# Altium PCB Expand_Board_no_arduino.PcbDoc
Units mil, origin at the board's own origin, x right, y up, seen from the top; angles counter-clockwise.
Board outline 6000 x 4000 mil, 2 copper layers (Top Layer, Bottom Layer); 45 components, 34 nets, 174 pads, 34 vias.
Unrouted connection lines stored in the file: 1.
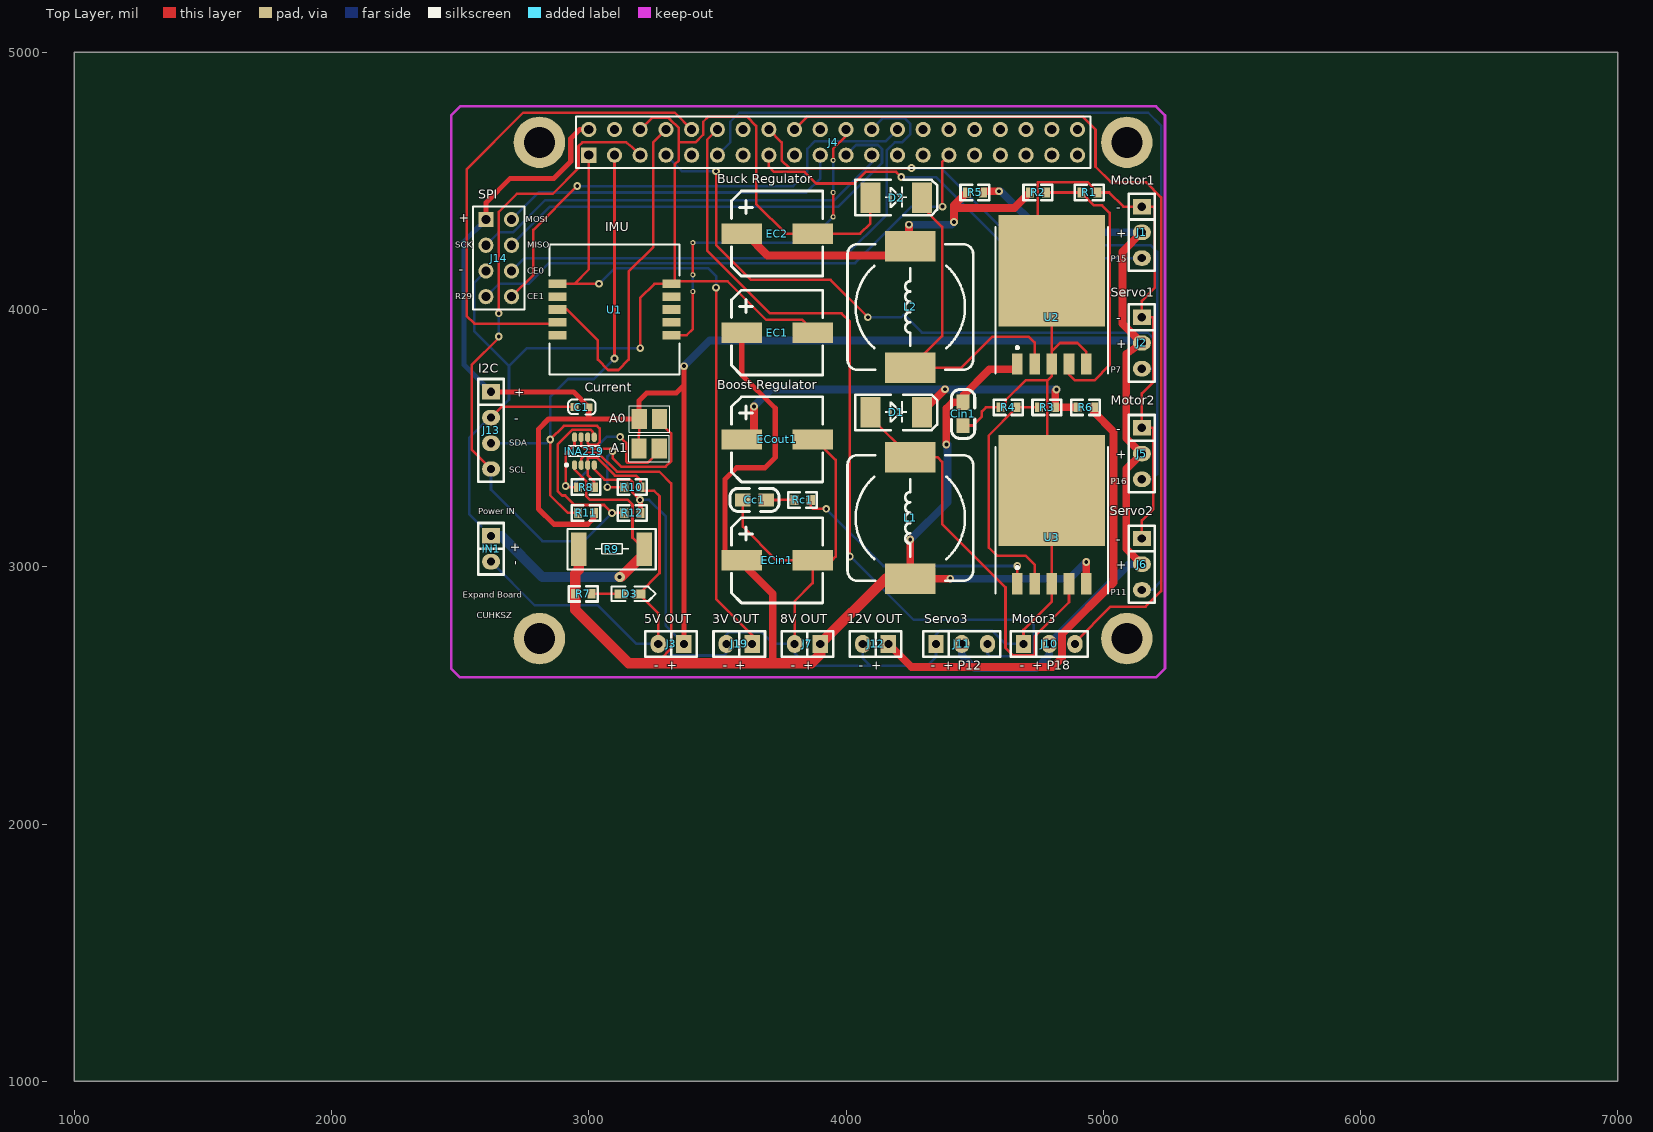
[diagram p0: Top Layer view]
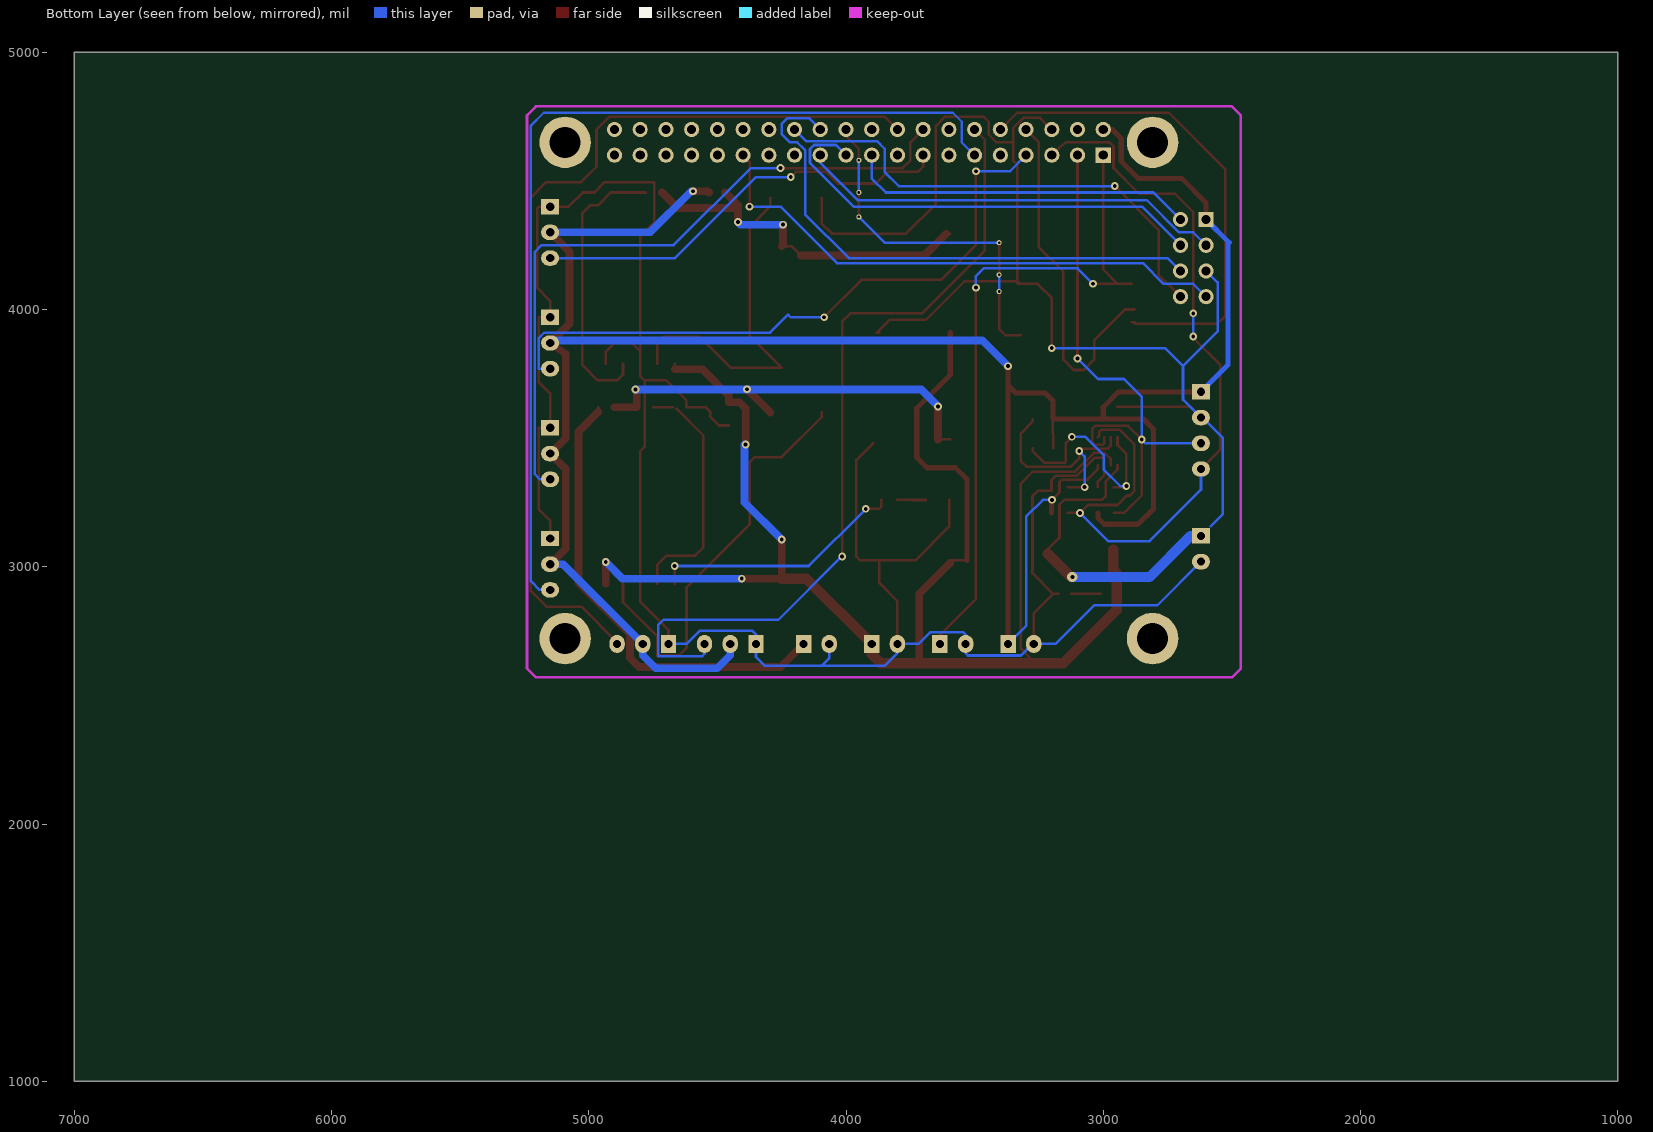
[diagram p1: Bottom Layer view, seen from below]

## Layer stack, top to bottom
Top Solder: solder mask 0.4, Solder Resist, Dk 3.5
Top Layer: signal copper 1.4
Dielectric 1: dielectric 12.6, FR-4, Dk 4.8
Bottom Layer: signal copper 1.4
Bottom Solder: solder mask 0.4, Solder Resist, Dk 3.5

## Board outline
1000,1000 7000,1000 7000,5000 1000,5000

## Design rules (kind name [scope] priority, off if disabled: settings)
Clearance [All] p1: gap=0
PolygonConnect [All] p1: connectstyle=Relief reliefconductorwidth=10 reliefentries=4 polygonreliefangle="90 Angle" airgapwidth=10
RoutingVias [All] p1: holewidth=28 width=50 viastyle="Through Hole" minholewidth=28 minwidth=50 maxholewidth=28 maxwidth=50
SolderMaskExpansion [All] p1: expansion=4
Width [All] p1: maxlimit=50 minlimit=10 preferedwidth=10
30 further rules are at their usual default settings.

## Components (designator, comment, footprint, x,y, rotation, side; value= is the part's Value field where it differs from the comment)
A0 "Switch_A0" TSOP65P180X145-2N 3235.31,3574 r0 top
A1 "Switch_A1" TSOP65P180X145-2N 3234.37,3460 r0 top
C1 "CAP1uF" 0603C 3000,3620 r180 top
Cc1 "CAP0.47uF" 0805C 3600,3260 r0 top
Cin1 "CAP 0.1uF" 0805C 4455,3550 r90 top
D1 "DIODE SCHOTTKY 1N5820" SMA/DO-214AC 4100,3600 r0 top
D2 "DIODE 5A  40V" SMA/DO-214AC 4100,4435 r0 top
D3 "LED" LED-0603B 3125,2894.74 r0 top
EC1 "Cin 470uF 50V" SMD-EC8X8X10 3865,3915 r0 top
EC2 "Cout  220uF 35V" SMD-EC8X8X10 3865,4300 r0 top
ECin1 "SMD_ECAP  100uF   25V" SMD-EC8X8X10 3865,3030 r0 top
ECout1 "SMD_ECAP  680uF    16V" SMD-EC8X8X10 3865,3500 r0 top
IN1 "Power In" "Pin HDR1X2/2.54mm-S" 2620,3120 r0 top
INA219 "INA219" INA219 2983.04,3449.39 r90 top
J1 "Motor1" "Pin HDR1X3/2.54mm-S" 5150,4400 r0 top
J2 "Servo1" "Pin HDR1X3/2.54mm-S" 5150,3970 r0 top
J3 "Power 5V" "Pin HDR1X2/2.54mm-S" 3370,2700 r270 top
J4 "Raspberry Pi" "Pin HDR2X20/2.54mm-S" 3000,4600 r0 top
J5 "Motor2" "Pin HDR1X3/2.54mm-S" 5150,3540 r0 top
J6 "Servo2" "Pin HDR1X3/2.54mm-S" 5150,3110 r0 top
J7 "Power 8V" "Pin HDR1X2/2.54mm-S" 3900,2700 r270 top
J10 "Motor3" "Pin HDR1X3/2.54mm-S" 4690,2700 r90 top
J11 "Servo3" "Pin HDR1X3/2.54mm-S" 4350,2700 r90 top
J12 "Power 12V" "Pin HDR1X2/2.54mm-S" 4165,2700 r270 top
J13 "I2C" "Pin HDR1X4/2.54mm-S" 2620,3680 r0 top
J14 "SPI" "Pin HDR2X4/2.54mm-S" 2600,4350 r270 top
J19 "Small Power 3V" "Pin HDR1X2/2.54mm-S" 3635,2700 r270 top
L1 "INDUCTOR CD127-68UH 680" CDRH127 4250,3190 r90 top
L2 "INDUCTOR   68uH" CDRH127 4250,4010 r90 top
R1 "RES1k" 0603R 4915,4455 r0 top
R2 "RES 3.3k" 0603R 4715,4455 r0 top
R3 "RES 48.7k" 0603R 4750,3620 r0 top
R4 "RES  5.62k" 0603R 4600,3620 r0 top
R5 "RES 0Ω" 0603R 4470,4455 r0 top
R6 "RES 0Ω" 0603R 4900,3620 r0 top
R7 "RES 1.5k" 0603R 3010,2895 r180 top
R8 "RES10k" 0603R 2958.04,3309.39 r0 top
R9 "RES0.1" 2512R 3213.04,3069.39 r180 top
R10 "RES10k" 0603R 3138.04,3309.39 r0 top
R11 "RES10k" 0603R 2958.04,3209.39 r0 top
R12 "RES10k" 0603R 3138.04,3209.39 r0 top
Rc1 "RES 2k" 0603R 3800,3260 r0 top
U1 "HI219M_IMU" SON127P1220X265-10N 3100,4000 r0 top
U2 "LM2596S-ADJ" TO-263-5 4800,3955 r0 top
U3 "LM2587S-ADJ" TO-263-5 4800,3100 r0 top

## Footprints (in the part's own frame and the unit in brackets; to place one, negate y for a bottom-side part, rotate by r counter-clockwise, add the part's x,y. Pads: shape width x height; smd on the part's side, far side on the other; paste and mask are expansions set on the pad)
0603C [mil]
  rect 30x30 smd: 1(0.21,-0.35) 2(55.21,-1.35)
  silkscreen extent -26,-30 81,28, body extent -1,-15 62,17, height 12
0603R [mm]
  rect 0.8x0.965 smd: 1(0,0) 2(1.6,0)
  silkscreen extent -0.64,-0.76 2.21,0.76, body extent -0.04,-0.41 1.56,0.41, height 0.45
0805C [mil]
  rect 60x50 smd: 1(-0.71,-0.4) 2(89.29,-0.4)
  silkscreen extent -51,-45 139,45, body extent 6,-25 84,25, height 31
2512R [mil]
  rect 61x129.92 smd: 1(-3.11,2) 2(251.89,2)
  silkscreen extent -47,-77 296,81, body extent 0,-63 249,63, height 24
CDRH127 [mm] "12*12*8mm（长宽高）"
  rect 3x5 smd: 1(-6,0) 2(6,0)
  silkscreen extent -6.2,-6.2 6.2,6.2, body extent -5.87,-6.03 6.13,5.97, height 7.8
INA219 [mm] "TSOP, 8-Leads, Body 2.90x1.60mm, Pitch 0.65mm, IPC Medium Density"
  oval 0.95x0.5 smd: 1(-1.375,0.975) 2(-1.375,0.325) 3(-1.375,-0.325) 4(-1.375,-0.975) 5(1.375,-0.975) 6(1.375,-0.325) 7(1.375,0.325) 8(1.375,0.975)
  silkscreen extent -1.5,-1.5 0.5,1.9, body extent -0.9,-1.5 0.9,1.5, height 1.45
LED-0603B [mil]
  rect 50x35 smd: A(0,0.26) K(70,0.26)
  silkscreen extent -36,-28 135,28, body extent 4,-15 66,17, height 24
"Pin HDR1X2/2.54mm-S" [mil]
  rect 70x60 hole 32: 1(0,0)
  oval 70x60 hole 32: 2(0,-100)
  silkscreen extent -50,-150 50,50, body extent -50,-150 50,50, height 336
"Pin HDR1X3/2.54mm-S" [mil]
  rect 70x60 hole 32: 1(0,0)
  oval 70x60 hole 32: 2(0,-100) 3(0,-200)
  silkscreen extent -50,-250 50,50, body extent -50,-250 50,50, height 336
"Pin HDR1X4/2.54mm-S" [mil]
  rect 70x60 hole 32: 1(0,0)
  oval 70x60 hole 32: 2(0,-100) 3(0,-200) 4(0,-300)
  silkscreen extent -50,-350 50,50, body extent -50,-350 50,50, height 336
"Pin HDR2X4/2.54mm-S" [mm] "Connector; Header; 4x2 Position"
  rect 1.5x1.5 hole 0.9: 1(0,0)
  round 1.5 hole 0.9: 2(0,2.54) 3(2.54,0) 4(2.54,2.54) 5(5.08,0) 6(5.08,2.54) 7(7.62,0) 8(7.62,2.54)
  silkscreen extent -1.27,-1.27 8.89,3.81, body extent -1.27,-1.27 8.89,3.81, height 7.58
"Pin HDR2X20/2.54mm-S" [mm] "Connector; Header; 20x2 Position"
  rect 1.5x1.5 hole 0.9: 1(0,0)
  round 1.5 hole 0.9: 2(0,2.54) 3(2.54,0) 4(2.54,2.54) 5(5.08,0) 6(5.08,2.54) 7(7.62,0) 8(7.62,2.54) 9(10.16,0) 10(10.16,2.54) 11(12.7,0) 12(12.7,2.54) 13(15.24,0) 14(15.24,2.54) 15(17.78,0) 16(17.78,2.54) 17(20.32,0) 18(20.32,2.54) 19(22.86,0) 20(22.86,2.54) 21(25.4,0) 22(25.4,2.54) 23(27.94,0) 24(27.94,2.54) 25(30.48,0) 26(30.48,2.54) 27(33.02,0) 28(33.02,2.54) 29(35.56,0) 30(35.56,2.54) 31(38.1,0) 32(38.1,2.54) 33(40.64,0) 34(40.64,2.54) 35(43.18,0) 36(43.18,2.54) 37(45.72,0) 38(45.72,2.54) 39(48.26,0) 40(48.26,2.54)
  silkscreen extent -1.27,-1.27 49.53,3.81, body extent -1.27,-1.27 49.53,3.81, height 7.58
SMA/DO-214AC [mm] "塑封二极管"
  rect 2x3 smd: A(-0.127,0) K(4.953,0)
  silkscreen extent -1.63,-1.75 6.48,1.75, body extent 0.11,-1.35 4.71,1.35, height 2.4
SMD-EC8X8X10 [mm]
  rect 4x2 smd: 1(-6.858,-0.127) 2(0.142,-0.127)
  silkscreen extent -7.88,-4.32 1.12,4.08, body extent -8.38,-4.28 1.52,4.02, height 10.2
SON127P1220X265-10N [mm] "SON, 10-Leads, Body 12.25x12.25mm, Pitch 1.27mm, IPC Medium Density"
  rect 1.8x0.85 smd: 1(-5.63,2.54) 2(-5.63,1.27) 3(-5.63,0) 4(-5.63,-1.27) 5(-5.63,-2.54) 6(5.63,-2.54) 7(5.63,-1.27) 8(5.63,0) 9(5.63,1.27) 10(5.63,2.54)
  silkscreen extent -6.4,-6.4 6.4,6.4, body extent -6.25,-6.25 6.25,6.25, height 2.65
TO-263-5 [mm] "贴片LM2596"
  rect 1.05x2.1 smd: 1(-3.4,-4.225) 2(-1.7,-4.225) 3(0,-4.225) 4(1.7,-4.225) 5(3.4,-4.225)
  rect 10.5x11 smd: 6(0,4.987)
  silkscreen extent -5.55,-5.18 5.55,9.28, body extent -5.33,-4.7 5.33,10.29, height 3
TSOP65P180X145-2N [mm] "TSOP, 2-Leads, Body 1.00x0.15mm, Pitch 0.65mm, IPC Medium Density"
  rect 1.5x2 smd: 1(-1,0) 2(1,0)
  silkscreen extent -2,-1.3 2,1.3

## Part data
A0 A1 U1: library part Component_1
C1 Cc1 Cin1: library part CAP, "无极性电容"
D1 D2: library part "DIODE SCHOTTKY", "肖特基二极管"
EC1 EC2 ECin1 ECout1: library part SMD_ECAP, "贴片电解电容"
IN1 J3 J7 J12 J19: library part "Pin HDR1X2"
J1 J2 J5 J6 J10 J11: library part "Pin HDR1X3"
J4: library part "Pin HDR2X20"
J13: library part "Pin HDR1X4"
J14: library part "Pin HDR2X4"
L1 L2: library part INDUCTOR, "INDUCTOR"
R1 R2 R3 R4 R5 R6 R7 R8 R9 R10 R11 R12 Rc1: library part RES
U2: "可调稳压芯片"
U3: library part LM2577S-ADJ, "DC升压"

## Free pads (board coordinates)
  round 200 hole 120: 0(2808.27,2720.87) 0(2808.27,4650) 0(5091.73,2720.87) 0(5091.73,4650)
  round 20 hole 10: 2(3405,4070) 3(3405,4135) 4(3405,4260) 5(3950,4360) 6(3950,4455) 9(3950,4580)

## Via types
v1: diameter 30, hole 15, Top Layer to Bottom Layer, 33 vias
v2: diameter 40, hole 15, Top Layer to Bottom Layer, 1 vias

## Nets (pads, with @x,y where several pads share a name; then routed paths per layer and width w, separated by ;. In a path a pad name is that pad's centre, name@x,y a point inside that pad or via, vN(x,y) a via of type N, cw(c..) or ccw(c..) an arc to the next point about the centre after c; other vN are vias at no path point)
A0: A0.2 INA219.7 R10.1 | length 838.8
  Top Layer w10: INA219.7 2970.24,3471.01 2983.25,3458 3085,3458 v1(3093,3450) 3093,3422 3125.87,3389.13 3299.13,3389.13 3320,3410 3320,3518.69 3274.69,3564 A0.2 ; v1(3072.39,3309.39) R10.1
  Bottom Layer w10: v1(3072.39,3309.39) 3072.39,3429.39 v1(3093,3450)
A1: A1.2 INA219.8 R8.1 | length 842.6
  Top Layer w10: INA219.8 2944.65,3472.5 2910,3437.85 v1(2910,3313.79) 2914.39,3309.39 R8.1 ; v1(3122,3505) 3145,3482 3145,3410 3150,3405 3230,3405 3273.74,3448.74 A1.2
  Bottom Layer w10: v1(2910,3313.79) 2933.79,3313.79 2998.71,3378.71 2998.71,3434.63 3069.09,3505 v1(3122,3505)
CE0: J4.24 J14.6 | length 2133
  Bottom Layer w10: J14.6 2750,4200 3989,4200 4159,4370 4159,4619.47 4189.53,4650 4217.53,4650 4250,4682.47 4250,4721 4227,4744 4144,4744 J4.24
CE1: J4.26 J14.8 | length 1924.5
  Top Layer w10: J14.8 2785,4135 2785,4310 v1(2955,4480)
  Bottom Layer w10: v1(2955,4480) 3795,4480 3850,4535 3850,4625 3880,4655 4155,4655 J4.26
GND: C1.2 Cc1.1 Cin1.1 D2.A D3.K EC1.2 EC2.2 ECin1.2 ECout1.2 IN1.2 INA219.3 J1.1 J2.1 J3.2 J4.6 J5.1 J6.1 J7.2 J10.1 J11.1 J12.2 J13.2 J14.5 J19.2 R1.2 R4.1 R8.2 R10.2 U1.10 U2.3 U2.5 U2.6 U3.3 U3.6 | length 14687
  Top Layer w10: J13.2 2661.35,3621.35 C1.2 ; R8.2 3021.03,3330.8 2995.84,3356 2995.84,3422.38 2997.42,3423.96 3032,3423.96 3101.96,3354 3184.03,3354 3201.03,3337 3201.03,3295.4 3254.6,3295.4 3275,3275 3275,2975 D3.K ; D3.K@3175,2895 D3.K ; v1(3200,3850) 3200,4045 3255,4100 U1.10 3331.65,4100 U1.10@3336.65,4105 ; J4.6 3245,4745 3310,4745 3315.47,4739.53 3316.37,4739.53 3350,4705.9 3350,4650 ; J3.2 3270,2820 D3.K ; U1.10@3329.05,4106.88 3335,4112.82 3335,4565 3350,4580 3350,4650 ; U1.10@3332.31,4105 U1.10@3336.65,4105 ; Cc1.1 3599.29,3155.71 3730,3025 ECin1.2 ; J7.2 3800,2866 3870.59,2936.59 ECin1.2 ; EC1.2 3880,3910 3830,3960 3690,3960 3540,4110 3341.65,4110 U1.10@3336.65,4105 ; ECout1.2@3895,3480 3960,3415 3960,3040 3945,3025 ECin1.2 ; D2.A 4095,4335 4055,4295 EC2.2 3767,4295 3651,4411 3651,4714 3615,4750 3465,4750 3445,4730 3445,4680 3415,4650 3350,4650 ; Cin1.1 4493.29,3549.29 4528,3584 4528,3604 4544,3620 R4.1 4621,3620 4621,3648 4698,3725 4783,3725 4800,3740.7 ; J10.1 4690,2755 4800,2865 U3.3 U3.6 4800,3449 4783,3466 4783,3723.7 4800,3740.7 ; U2.5 4933.86,3836.14 4900,3870 4832,3870 4800,3838 ; J6.1 5150,3180 5195,3225 5195,3540 J5.1 5150,3674 5195,3719 5195,3970 J2.1 5150,4034 5201,4085 5201,4392 5193,4400 J1.1 5078,4400 5023,4455 R1.2 4937.99,4495 4745,4495 4745,4341 4800,4286 U2.6 4800,3838 ; 4800,3740.7 U2.3 4800,3838
  Bottom Layer w10: 2582.81,3157.19 2535,3205 2535,3500 2615,3580 J13.2 2690,3650 2690,3780 ; J14.5 2555,4105 2555,3915 2690,3780 ; IN1.2 2790,2850 3035,2850 3185,2700 J3.2 3275,2700 3320,2655 3526,2655 3535,2664 J19.2 3535,2736 3544,2745 3673,2745 3718,2700 J7.2 3800,2665 3850,2615 4095,2615 ; v1(3200,3850) 2760,3850 2690,3780 ; J12.2 4065,2645 4095,2615 ; J10.1 4620,2700 4568,2752 4366,2752 4350,2736 J11.1 4350,2650 4315,2615 4095,2615
MISO: J4.21 J14.4 | length 1789.4
  Bottom Layer w10: J14.4 2850,4400 3970,4400 4140,4570 4140,4624 4124.47,4639.53 4039.53,4639.53 J4.21
MOSI: J4.19 J14.2 | length 1366.3
  Bottom Layer w10: J14.2@2700,4340 J14.2 2805,4455 3845,4455 3900,4510 J4.19
MOTOR1: J1.3 J4.15 | length 1679.3
  Top Layer w10: J4.15 3700,4555 3720,4535 3838.75,4535 3883.75,4490 4031.25,4490 4076.25,4535 4195,4535 v1(4215,4515)
  Bottom Layer w10: v1(4215,4515) 4350,4515 4665,4200 J1.3
MOTOR2: J4.16 J5.3 | length 2680.5
  Top Layer w10: J4.16 3750,4650 3750,4580 3780,4550 4136.25,4550 v1(4255,4550)
  Bottom Layer w10: v1(4255,4550) 4370,4550 4670,4250 5184,4250 5210,4224 5210,3360 5190,3340 J5.3
MOTOR3: J4.18 J10.3 | length 3615.1
  Top Layer w10: J4.18 3850,4750 4920,4750 4970,4700 4970,4555 5030,4495 5166,4495 5225,4436 5225,2905 5165,2845 5029,2845 4890,2706 J10.3
NetCc1_2: Cc1.2 Rc1.1 | length 110.9
  Top Layer w10: Cc1.2 3744,3259.6 3744.4,3260 Rc1.1
NetD1_A: D1.A L1.2 U3.4 | length 1654
  Top Layer w10: D1.A 4095,3581.22 L1.2 4355.78,3426.22 4374,3408 4374,3166 4620,2920 4620,2685 4650,2655 4733,2655 4733,2728.07 4866.93,2862 U3.4
NetD2_K: D2.K L2.1 U2.2 | length 1371
  Top Layer w10: D2.K 4295,4400 4373.43,4321.57 4373.43,3897.21 L2.1 4448.78,3773.78 4570,3895 4710.07,3895 4733.07,3872 U2.2
NetD3_A: D3.A R7.1 | length 115
  Top Layer w10: R7.1 D3.A
NetR1_1: R1.1 R2.2 U2.4 | length 1104.4
  Top Layer w10: R2.2 R1.1 4965,4405 4996,4405 5025,4376 5025,3784 4966,3725 4890,3725 4866.93,3748.07 U2.4
NetR3_1: R3.1 R4.2 U3.2 | length 939.7
  Top Layer w10: R4.2@4659.81,3614.81 4555,3510 4555,3075 4586.38,3043.62 4697.45,3043.62 4733.07,3008 U3.2 ; R4.2@4673.66,3620 R3.1
NetRc1_2: Rc1.2 U3.1 | length 994.2
  Top Layer w10: Rc1.2 3862.99,3234.01 3872,3225 v1(3923,3225) ; U3.1 v1(4666.14,3003)
  Bottom Layer w10: v1(3923,3225) 4145,3003 v1(4666.14,3003)
RST_IMU: J4.22 pad.2 pad.3 pad.4 pad.5 pad.6 pad.9 U1.6 | length 1375.8
  Top Layer w10: U1.6 3380,3900 3405,3925 pad.2 ; pad.3 pad.4 ; pad.5 pad.6 ; pad.9 3950,4625 4000,4675 J4.22
  Bottom Layer w10: pad.2 pad.3 ; pad.4 3850,4260 pad.5 ; pad.6 pad.9
RST_SPI: J4.29 J14.7 | length 2130.3
  Top Layer w10: v1(4375,4400) 4375,4575 J4.29
  Bottom Layer w10: J14.7 2650,4100 2765,4100 2845,4180 4035,4180 4255,4400 v1(4375,4400)
RXD_PI: J4.10 U1.4 | length 1935.5
  Top Layer w10: U1.4@2875,3945 2555,3945 2525,3975 2525,4545 2745,4765 3335,4765 J4.10 ; U1.4 U1.4@2888.35,3950
SCL: INA219.5 J4.5 J13.4 R12.1 | length 3147.1
  Top Layer w10: J13.4 2545,3455 2545,3785 2650,3890 v1(2650,3895) ; v1(2650,3985) 2650,4380 2720,4450 2860,4450 2960,4550 2960,4635 2975,4650 3145.47,4650 3167.74,4632.26 J4.5 ; INA219.5 3015.68,3509.28 3015.68,3524.32 3007,3533 2936,3533 2879,3476 2879,3294 2896,3277 2908,3277 2945,3240 3059.39,3240 v1(3090,3209.39) R12.1
  Bottom Layer w10: J13.4 2620,3300 2820,3100 2980.61,3100 v1(3090,3209.39) ; v1(2650,3895) v1(2650,3985)
SCLK: J4.23 J14.3 | length 1662.5
  Bottom Layer w10: J14.3 2650,4300 2705.9,4300 2830.9,4425 3955,4425 4100,4570 J4.23
SDA: INA219.6 J4.3 J13.3 R11.1 | length 2219.6
  Top Layer w10: R11.1 2918.61,3209.39 2850,3278 v1(2850,3495) 2903,3548 3032,3548 3042,3538 3042,3484 3032,3474 3002.84,3474 2995.84,3481 INA219.6 ; v1(3100,3810) J4.3
  Bottom Layer w10: J13.3@2605,3465 J13.3@2620,3465 ; J13.3 2835,3480 v1(2850,3495) 2850,3660 2920,3730 3020,3730 v1(3100,3810)
SERVO1: J2.3 J4.7 | length 2529.6
  Top Layer w10: v1(3495,4537.5) 3495,4250 3630,4115 3940,4115 v1(4085,3970)
  Bottom Layer w10: J4.7 3362.5,4537.5 v1(3495,4537.5) ; v1(4085,3970) 4215,3970 4225,3980 4295,3910 5173,3910 5195,3888 5195,3770 J2.3
SERVO2: J4.11 J6.3 | length 3721
  Bottom Layer w10: J4.11 3550,4650 3550,4730 3585,4765 5175,4765 5225,4715 5225,2944 5191,2910 J6.3
SERVO3: J4.12 J11.3 | length 3240.9
  Top Layer w10: J4.12 3460,4660 3460,4230 3705,3985 3983,3985 4015,3953 v1(4015,3040)
  Bottom Layer w10: v1(4015,3040) 4015,3042 4263,2794 4709,2794 4730,2773 4730,2652 4560,2652 4550,2662 J11.3
TXD_PI: J4.8 U1.3 | length 1389.6
  Top Layer w10: U1.3 2915,4000 3035,3880 3035,3805 3075,3765 3115,3765 3155,3805 3155,4147 3250,4242 3250,4650 J4.8
VCC_3V: J4.1 J19.1 U1.1 | length 2655.1
  Top Layer w10: U1.1@2888.35,4100 2944,4100 ; J4.1 3000,4156 2944,4100 ; v1(3040,4100) 2944,4100 ; v1(3495,4085) 3495,2875 3635,2735 J19.1
  Bottom Layer w10: v1(3040,4100) 3100,4160 3465,4160 3495,4130 v1(3495,4085)
VCC_5V: A0.1 A1.1 C1.1 INA219.4 J1.2 J2.2 J3.1 J4.2 J5.2 J6.2 J10.2 J11.2 J13.1 J14.1 R5.2 R11.2 R12.2 | length 10189.5
  Top Layer w10: 2999.79,3574.21 3000,3574 ; INA219.4 3021.43,3378.57 3061,3339 3160,3339 3170,3329 3170,3289 v1(3199,3260) v1@3201.03,3257.97 ; A1.1 3195,3516 3195.94,3516.94 A0.1
  Top Layer w20: J14.1 2600,4415 2695,4510 2865,4510 2930,4575 2930,4665 2965,4700 J4.2 ; J13.1 2940.14,3680 C1.1 2999.79,3574.21 ; R11.2 3021.03,3189.82 2996.21,3165 2865,3165 2805,3225 2805,3535 2844,3574 3000,3574 A0.1 3195.94,3645.94 3225,3675 3340,3675 3370,3705 ; R12.2 v1@3201.03,3257.97 ; J3.1 3370,3705 ; v1(3370,3780) 3370,3705
  Top Layer w30: R5.2 4537.99,4460 v1(4595,4460) ; J6.2 5090,3070 5090,3380 J5.2 5090,3500 5090,3827 J2.2 5075,3945 5075,4225 J1.2
  Bottom Layer w10: 2510,4260 2515,4255 ; v1(3199,3260) 3235,3260 3300,3195 3300,2770 J3.1
  Bottom Layer w20: 2510,4260 J14.1 ; 2515,4255 2515,3785 J13.1
  Bottom Layer w30: v1(3370,3780) 3470,3880 5140,3880 J2.2 ; J11.2 4450,2656 4501,2605 4739,2605 4790,2656 J10.2 5100,3010 J6.2 ; v1(4595,4460) 4601.99,4460 4761.99,4300 J1.2
VCC_8V: Cin1.2 EC1.1 ECin1.1 INA219.2 J7.1 L1.1 R7.2 R9.2 U2.1 U3.5 | length 6414.7
  Top Layer w10: INA219.2 2970.24,3419 2994.24,3443 3036.57,3443 3109.57,3370 3274,3370 3320,3324 3320,2682 3278,2640 ; ECin1.1@3530,3025 ECin1.1 ECin1.1@3595,3015 ; U2.1@4666.14,3768 U2.1
  Top Layer w20: ECin1.1@3530,3025 3530,3340 3575,3385 3685,3385 3725,3425 3725,3616 3595,3746 EC1.1
  Top Layer w30: ECin1.1@3595,3015 3715,2895 3715,2625 ; v1(4250,3106) L1.1 v1(4405,2953.78) ; v1(4390,3475) 4390,3615 4414.29,3639.29 Cin1.2 4455.4,3665.4 4558,3768 U2.1@4666.14,3768 ; U3.5 v1(4933.86,3018.86)
  Top Layer w40: R9.2 2961.15,2988.14 2947.01,2974 R7.2 2947.01,2832.99 3155,2625 3715,2625 3865,2625 3900,2660 J7.1 4153.78,2953.78 L1.1
  Bottom Layer w30: v1(4250,3106) 4395,3251 v1@4395,3475 ; v1(4405,2953.78) 4868.78,2953.78 v1(4933.86,3018.86)
VCC_12V: J12.1 R6.2 | length 1815.9
  Top Layer w10: R6.2@4962.99,3602.01 R6.2
  Top Layer w30: J12.1 4255,2610 4804,2610 4840,2646 4840,2739 5040,2939 5040,3525 R6.2@4962.99,3602.01
VCC_BOOST12V: D1.K ECout1.1 R3.2 R6.1 | length 1675
  Top Layer w10: ECout1.1 ECout1.1@3642,3495 ; v1@4812.99,3683.99 v1(4818,3689)
  Top Layer w30: ECout1.1@3642,3495 v1(3642,3623) ; D1.K v1(4385,3690) ; v1@4812.99,3683.99 R3.2 R6.1
  Bottom Layer w10: v1@4810,3697 v1(4818,3689)
  Bottom Layer w30: v1(3642,3623) 3708,3689 v1(4818,3689)
VCC_BUCK5V: EC2.1 L2.2 R2.1 R5.1 | length 1415.8
  Top Layer w10: EC2.1 EC2.1@3610,4295 ; L2.2@4174.78,4210 4211,4246.22 L2.2
  Top Layer w30: EC2.1@3610,4295 3695,4210 L2.2@4174.78,4210 ; v1(4245,4330) 4245,4251.22 L2.2 ; v1(4420,4340) 4420,4395 4655,4395 R2.1 ; 4420,4405 R5.1
  Bottom Layer w30: v1(4245,4330) 4410,4330 v1(4420,4340)
VCC_IN: IN1.1 INA219.1 R9.1 | length 1202.9
  Top Layer w10: INA219.1 2944.65,3378.35 2990,3333 2990,3275 3005,3260 3152,3260 3170,3242 3170,3113.54 R9.1 R9.1@3216.15,3051.15
  Top Layer w40: v2(3120,2960) 3125,2960 R9.1@3216.15,3051.15
  Bottom Layer w40: 2660,3120 2820,2960 v2(3120,2960)
pads on no net: J4.4 J4.9 J4.13 J4.14 J4.17 J4.20 J4.25 J4.27 J4.28 J4.30 J4.31 J4.32 J4.33 J4.34 J4.35 J4.36 J4.37 J4.38 J4.39 J4.40 U1.2 U1.5 U1.7 U1.8 U1.9

## Keep-outs
Keep-Out Layer:
  lines w10: 2465,2605 2465,4755 2500,4790 5205,4790 5240,4755 5240,2605 5205,2570 2500,2570 2465,2605

## Silkscreen, mask and mechanical layers (free items; w line width, h text height)
Top Overlay:
  text "Buck Regulator" at 3500,4490 h36
  text "Motor1" at 5030,4485 h36
  text "SPI" at 2570,4430 h36
  text "-" at 5050,4380 h36
  text "+" at 2495,4340 h36
  text "MOSI" at 2755,4340 h24
  text "IMU" at 3065,4305 h36
  text "+" at 5050,4280 h36
  text "SCK" at 2480,4240 h24
  text "MISO" at 2760,4240 h24
  text "P15" at 5030,4185 h24
  text "-" at 2495,4140 h36
  text "CE0" at 2760,4140 h24
  text "Servo1" at 5030,4050 h36
  text "R29" at 2480,4040 h24
  text "CE1" at 2760,4040 h24
  text "-" at 5050,3950 h36
  text "+" at 5050,3850 h36
  text "I2C" at 2570,3755 h36
  text "P7" at 5030,3755 h24
  text "Boost Regulator" at 3500,3690 h36
  text "Current" at 2985,3680 h36
  text "+" at 2710,3660 h36
  text "Motor2" at 5030,3630 h36
  text "-" at 2710,3560 h36
  text "-" at 5050,3520 h36
  text "SDA" at 2690,3470 h24
  text "+" at 5050,3420 h36
  text "SCL" at 2690,3365 h24
  text "P16" at 5030,3320 h24
  text "Power IN" at 2570,3205 h24
  text "Servo2" at 5025,3200 h36
  text "-" at 5050,3090 h36
  text "-  +" at 2730,3005 h36 r90
  text "+" at 5050,2990 h36
  text "P11" at 5030,2890 h24
  text "Expand Board" at 2510,2880 h24
  text "CUHKSZ" at 2565,2800 h24
  text "5V OUT" at 3215,2780 h36
  text "3V OUT" at 3480,2780 h36
  text "8V OUT" at 3745,2780 h36
  text "12V OUT" at 4005,2780 h36
  text "Servo3" at 4305,2780 h36
  text "Motor3" at 4645,2780 h36
  text "-  +" at 3255,2600 h36
  text "-  +" at 3520,2600 h36
  text "-  +" at 3785,2600 h36
  text "-  +" at 4050,2600 h36
  text "-  + P12" at 4330,2600 h36
  text "-  + P18" at 4675,2600 h36